# Altium PCB pcbmain-env.PcbDoc (part 2 of 2)
Units mm, origin at the board's own origin, x right, y up, seen from the top; angles counter-clockwise.
Board outline 100 x 50 mm, 2 copper layers (Top Layer, Bottom Layer); 81 components, 76 nets, 303 pads, 56 vias.
Unrouted connection lines stored in the file: 77.
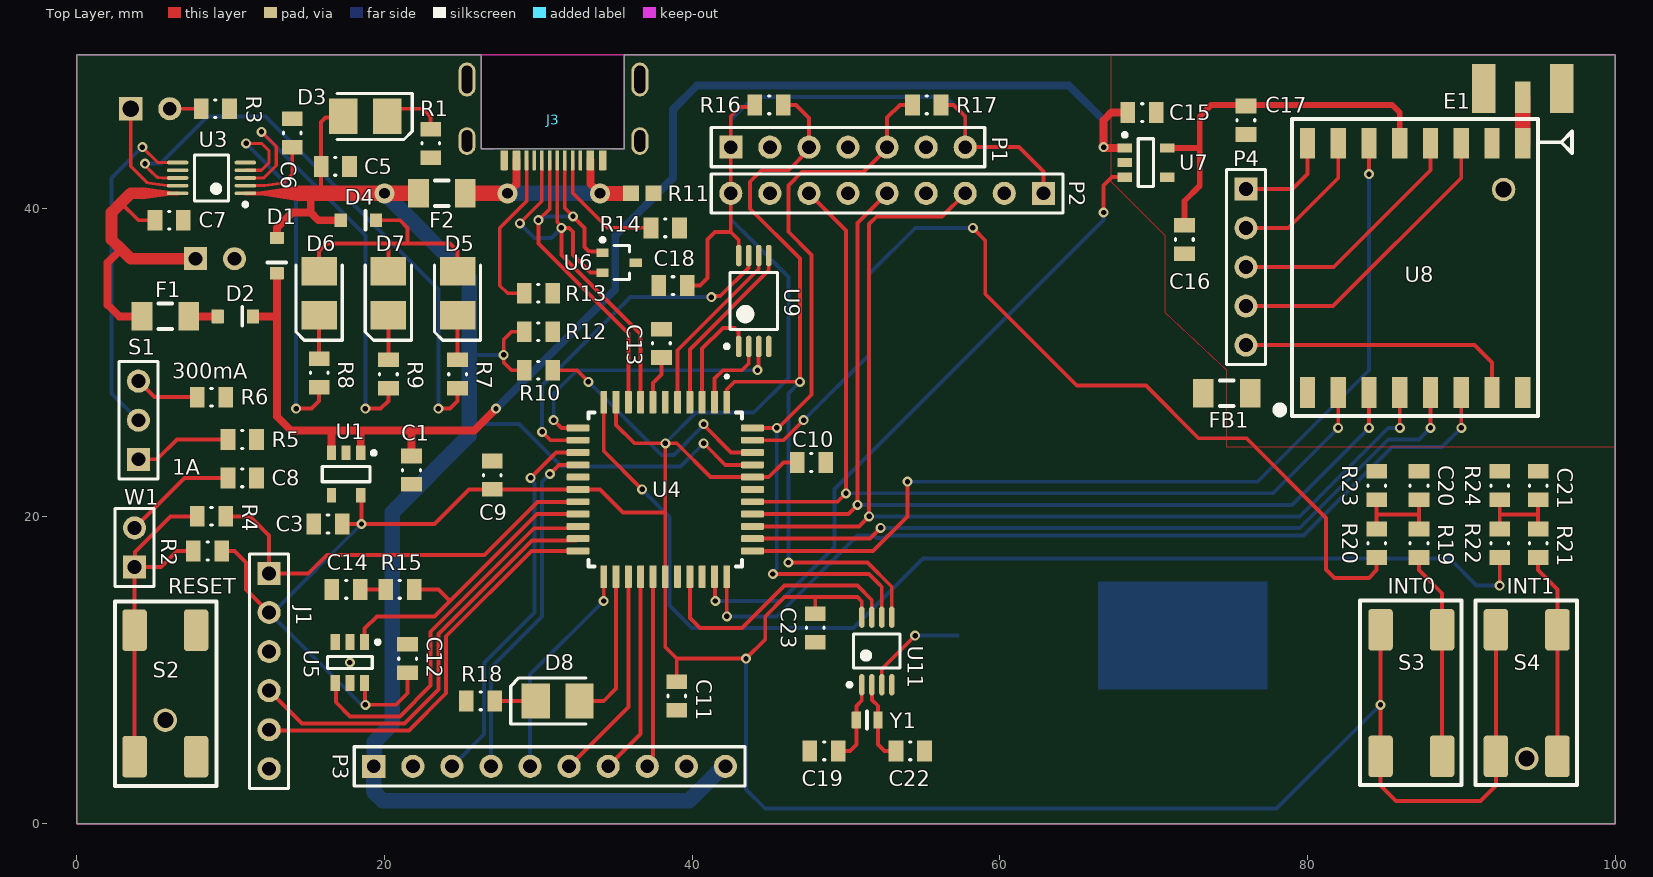
[diagram p0: Top Layer view]

## Via types
v1: diameter 0.65, hole 0.35, Top Layer to Bottom Layer, 53 vias
v2: diameter 1.3, hole 0.7, Top Layer to Bottom Layer, 3 vias

## Nets (pads, with @x,y where several pads share a name; then routed paths per layer and width w, separated by ;. In a path a pad name is that pad's centre, name@x,y a point inside that pad or via, vN(x,y) a via of type N, cw(c..) or ccw(c..) an arc to the next point about the centre after c; other vN are vias at no path point) (continued)
VBUS: (continued)
  Top Layer w0.254: U3.1 14.5,41 ; 15.2,40.95 15.25,41 ; 15.875,41 C5.2 15.875,45.625 16.168,45.918 17.243,45.918 D3.1 ; R10.2 28.25,29.5 27.75,30 v1(27.75,30.5) 27.75,31.5 28.25,32 R12.1 ; v1(40.75,24.75) 42.15,23.35 U4.41
  Top Layer w0.508: D1.2 13,38.75 14,39.75 15.2,39.75 ; 15.2,40.95 15.2,39.75 ; D4.2 15.7,39.25 15.2,39.75
  Top Layer w1.016: 14.5,41 15.25,41 15.875,41 v2(20,41) F2.1
  Bottom Layer w0.254: 25.5,26 28.75,26 31.5,23.25 39.25,23.25 v1(40.75,24.75) ; 25.5,30.5 v1(27.75,30.5)
  Bottom Layer w1.016: v2(20,41) 25.5,35.5 25.5,30.5 25.5,26 25.5,25.25 20.5,20.25 20.5,6.5 19.337,5.337 19.337,3.992 19.3,3.955 P3.1 19.3,2.095 19.895,1.5 39.779,1.5 42.029,3.75 P3.10
VBUSIN: F2.2 J3.A4-B9 J3.B4-A9 R11.1 | length 15.3
  Top Layer w0.508: v2(28,41) 28.58,41.58 J3.B4-A9 ; J3.A4-B9 33.38,41.62 v2(34,41)
  Top Layer w0.965: v2(34,41) R11.1@35.75,41
  Top Layer w1.016: F2.2 v2(28,41)
  Bottom Layer w1.016: v2(28,41) v2(34,41)
VCAP: C13.2 U4.7 | length 3.1
  Top Layer w0.254: U4.7 37.45,28.666 38,29.216 C13.2
VIN: C1.2 C15.2 D1.1 D2.1 U1.1 U1.3 U7.1 | length 91
  Top Layer w0.254: 21.75,25.536 21.786,25.571
  Top Layer w0.508: D2.1 13,33 ; D1.1 13,33 ; U1.3 16.55,25.521 16.5,25.571 ; U1.1 18.45,25.521 ; C1.2 21.75,25.536 ; v1(27.25,27) 25.821,25.571 21.786,25.571 18.45,25.571 16.5,25.571 ; v1(66.75,44) 66.788,44 66.838,43.95 U7.1 ; v1@66.75,44.038 66.75,45.75 67.25,46.25 C15.2 ; 13,33 13,26.5 13.929,25.571 16.5,25.571
  Bottom Layer w0.508: v1(27.25,27) 35,34.75 35,38.25 38.75,42 38.75,46.452 40.298,48 64.5,48 66.75,45.75 v1(66.75,44)
VREF: R15.2 U4.19 U5.1 | length 20.5
  Top Layer w0.254: U5.1 18.7,12.7 19.5,13.5 23.25,13.5 24.25,14.5 ; R15.2 23.5,15.25 24.25,14.5 ; U4.19 29.9,20.15 24.25,14.5
VREFEN: U4.20 U5.4 | length 24.6
  Top Layer w0.254: U5.4 16.832,9.143 16.832,7.918 17.75,7 21,7 23,9 23,12.5 29.727,19.227 32.457,19.227 U4.20
VREG: C3.2 C9.1 C10.1 C11.2 C12.1 C18.2 C23.2 J1.2 P1.1 P1.7 P2.1 P2.9 R2.2 R16.1 R17.1 S3.1-2 S4.1-2 U1.5 U4.10 U4.17 U4.28 U4.40 U5.6 U9.8 U11.8 | length 253.4
  Top Layer w0.254: R2.2@9.675,17.75 10.25,17.75 11,17 11,15.25 J1.2 ; C3.2 v1(18.5,19.5) ; U1.5 18.5,21.325 v1(18.5,19.5) ; U5.6 18.725,9.15 18.725,7.775 v1(18.75,7.75) 20.75,7.75 21.5,8.5 C12.1 ; U4.10 35.05,25.95 36.25,24.75 v1(38.25,24.75) ; C11.2 39,10.75 ; C18.2 40.5,35 41,35.5 41,38 41.49,38.49 42.51,38.49 ; U9.8 43.025,37.975 42.51,38.49 ; R16.1 43.943,46.618 43.118,46.618 42.51,46.01 P1.1 P2.9 42.51,38.49 ; C10.1 45.928,23.5 44.978,22.55 U4.40 41.2,22.55 39,24.75 v1(38.25,24.75) ; C23.2 48,14.75 ; U11.8 51.025,14.475 50.75,14.75 48,14.75 ; R17.1 57,46.75 57.75,46 P1.7 61.25,44 62.83,42.42 P2.1 ; S3.1-2@84.75,12.625 84.75,2.5 85.75,1.5 91.25,1.5 92.25,2.5 92.25,4.4 S4.1-2@92.25,12.625 ; v1(18.5,19.5) 23.25,19.5 25.5,21.75 C9.1 U4.17 34,21.75 35.5,20.25 38.25,20.25 ; 38.25,20.25 U4.28 38.25,11.5 39,10.75 ; 38.25,20.25 38.25,21.75 v1(38.25,24.75) ; 39,10.75 v1(43.5,10.75) 44.75,12 44.75,13.5 46,14.75 48,14.75
  Bottom Layer w0.254: v1@18.424,19.424 12.75,13.75 J1.2 18.424,7.826 18.674,7.826 v1(18.75,7.75) ; v1(38.25,24.75) 40.25,26.75 44,26.75 46.25,29 46.25,35.573 43.979,37.845 42.51,39.313 P2.9 ; P1.1 42.51,45.76 44,47.25 56.5,47.25 57.75,46 P1.7 ; v1(43.5,10.75) 43.5,2.25 44.75,1 78,1 v1(84.75,7.75)
VRF: C16.2 C17.2 U7.5 U8.13 | length 25.1
  Top Layer w0.381: U7.5 73,43.95 ; C16.2 72,40.5 73,41.5 73,43.95 ; U8.13 86,46.25 85.5,46.75 73.75,46.75 73,46 73,43.95
X1: C19.2 U11.1 Y1.2 | length 5.4
  Top Layer w0.254: C19.2 50.25,4.75 50.673,5.173 Y1.2 50.673,7.673 51.025,8.025 U11.1
X2: C22.2 U11.2 Y1.1 | length 5.4
  Top Layer w0.254: U11.2 51.693,9.032 51.693,8.07 52.073,7.69 Y1.1 52.073,5.177 52.5,4.75 C22.2
pads on no net: J1.6 J3.A8 J3.B8 U1.4 U4.31 U7.4
copper on no net:
  other v1: 17.75,10.5

## Polygon pours and split planes (outlines as drawn)
GND on Top Layer "GND-TOP" (solid, remove dead copper, shelved, pour order 6): 100,0 100,24.5 74.75,24.5 74.75,29.5 70.75,33.25 70.75,38.25 67.25,41.75 67.25,50 0,50 0,0
SIG on Top Layer "SIG-TOP" (solid, remove dead copper, shelved, pour order 2): 100,50 100,24.5 92,24.5 74.75,24.5 74.75,29.5 70.75,33.25 70.75,38.25 67.25,41.75 67.25,50
GND on Bottom Layer "GND-BOT" (solid, remove dead copper, shelved, pour order 7): 100,0 100,24.5 74.75,24.5 74.75,29.5 70.75,33.25 70.75,38.25 67.25,41.75 67.25,50 0,50 0,0
SIG on Bottom Layer "SIG-BOT" (solid, remove dead copper, shelved, pour order 0): 100,50 100,24.5 92,24.5 74.75,24.5 74.75,29.5 70.75,33.25 70.75,38.25 67.25,41.75 67.25,50

## Keep-outs
Keep-Out Layer:
  lines w0.025: 26.3,50 26.3,43.9 27.1,43.9 ; 34.8,43.9 35.6,43.9 35.6,50 ; 0,0 100,0 100,50 0,50 0,0

## Silkscreen, mask and mechanical layers (free items; w line width, h text height)
Top Overlay:
  text "300mA" at 6.203,28.953 h1
  text "1A" at 6.203,22.703 h1
  text "RESET" at 5.953,14.953 h1
  text "INT0" at 85.203,14.953 h1
  text "INT1" at 92.953,14.953 h1
Bottom Overlay:
  text "LIPO" at 8.297,40.203 h1
  text "CR2032" at 77.047,22.953 h1
notes:
  lines w0.025: 2,2 2,48 98,48 98,2 2,2
Board Outline:
  the board outline again, w0.025